# Altium PCB reflextest.PcbDoc
Units mil, origin at the board's own origin, x right, y up, seen from the top; angles counter-clockwise.
Board outline 6000 x 4000 mil, 2 copper layers (Top Layer, Bottom Layer); 2 components, 1 nets, 20 pads, 0 vias.
Unrouted connection lines stored in the file: 1.
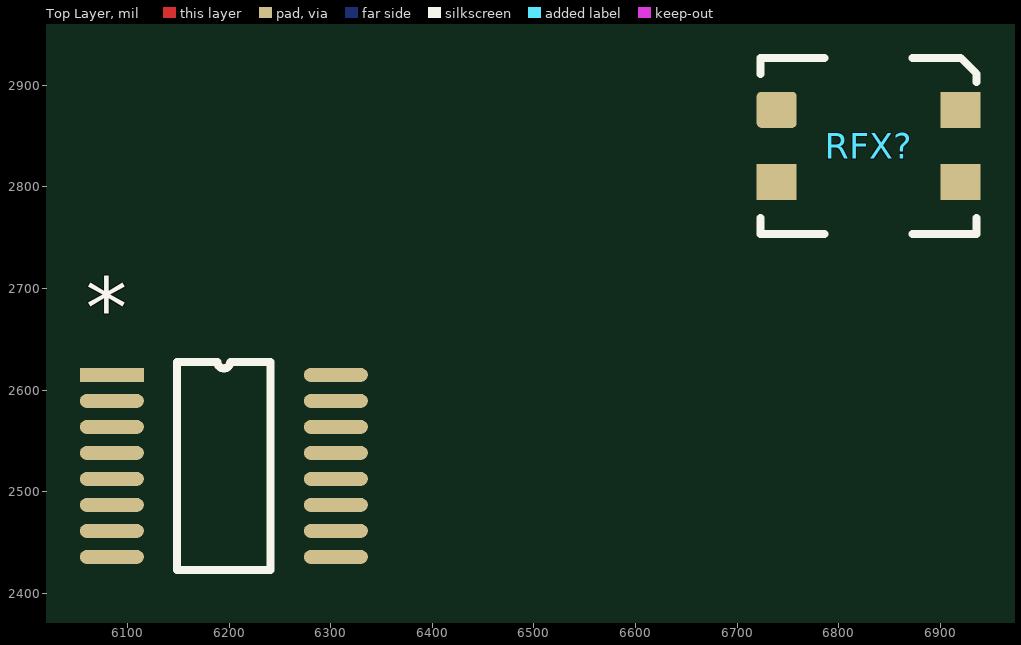
[diagram p0: Top Layer view]
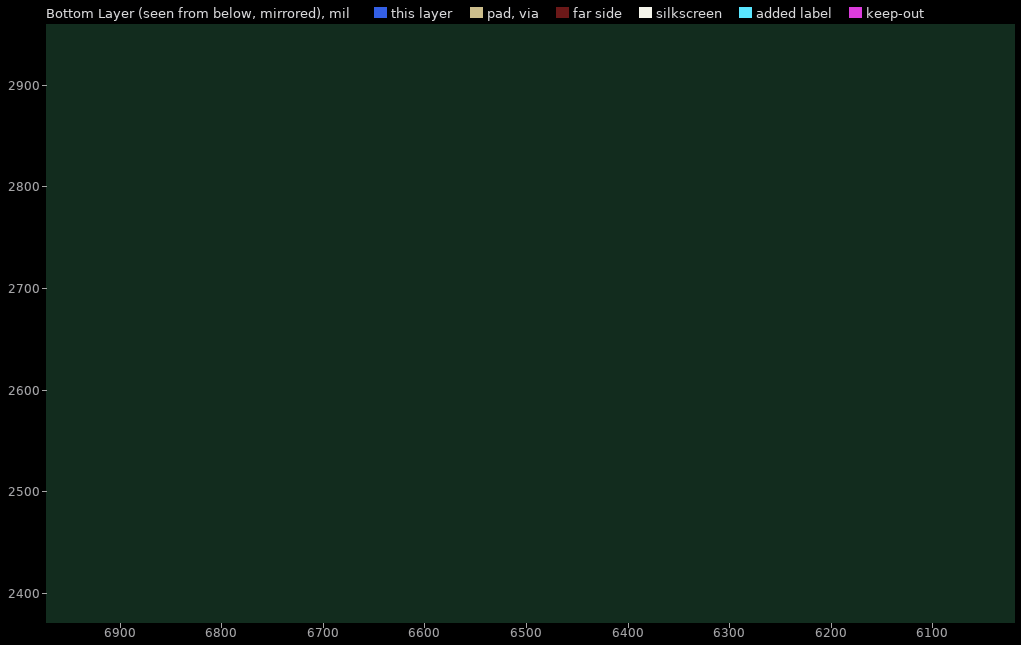
[diagram p1: Bottom Layer view, seen from below]

## Layer stack, top to bottom
Top Solder: solder mask 0.4, Solder Resist, Dk 3.5
Top Layer: signal copper 1.4
Dielectric 1: dielectric 12.6, FR-4, Dk 4.8
Bottom Layer: signal copper 1.4
Bottom Solder: solder mask 0.4, Solder Resist, Dk 3.5

## Board outline
1000,1000 7000,1000 7000,5000 1000,5000

## Design rules (kind name [scope] priority, off if disabled: settings)
Clearance [All] p1: gap=10
PolygonConnect [All] p1: connectstyle=Relief reliefconductorwidth=10 reliefentries=4 polygonreliefangle="90 Angle" airgapwidth=10
RoomDefinition Sheet1 [InComponentClass('Sheet1')] p1: confinementstyle=ConfineIn formatcopy=TRUE lockcomponents=FALSE outline 7045,1060 7645,1060 7645,1370 7045,1370
RoutingVias [All] p1: holewidth=28 width=50 viastyle="Through Hole" minholewidth=28 minwidth=50 maxholewidth=28 maxwidth=50
SolderMaskExpansion [All] p1: expansion=4
Width [All] p1: maxlimit=10 minlimit=10 preferedwidth=10
30 further rules are at their usual default settings.

## Components (designator, comment, footprint, x,y, rotation, side; value= is the part's Value field where it differs from the comment)
* "mux" 4051 6084.53,2615 r0 top
RFX? "ITR1201" "LCC4 - duplicate4" 6738.9,2875.87 r0 top

## Footprints (in the part's own frame and the unit in brackets; to place one, negate y for a bottom-side part, rotate by r counter-clockwise, add the part's x,y. Pads: shape width x height; smd on the part's side, far side on the other; paste and mask are expansions set on the pad)
4051 [mm]
  oval 1.6x0.35 smd: a(5.6,-3.25) b(5.6,-3.9) c(5.6,-4.55) COM(0,-1.3) gnd(0,-4.55) inh(0,-3.25) nc(0,-3.9) vcc(5.6,0) y0(5.6,-1.95) y1(5.6,-1.3) y2(5.6,-0.65) y3(5.6,-2.6) y5(0,-2.6) y6(0,-0.65) y7(0,-1.95)
  rect 1.6x0.35 smd: y4(0,0)
  silkscreen extent 1.63,-4.88 3.97,0.33
"LCC4 - duplicate4" [mm]
  rrect25% 1x0.9 smd: 1(0,0)
  rect 1x0.9 smd: 2(4.6,0) 3(0,-1.8) 4(4.6,-1.8)
  silkscreen extent -0.4,-3.1 5,1.3, body extent 0.6,-2.8 4,1, height 1.5

## Nets (pads, with @x,y where several pads share a name; then routed paths per layer and width w, separated by ;. In a path a pad name is that pad's centre, name@x,y a point inside that pad or via, vN(x,y) a via of type N, cw(c..) or ccw(c..) an arc to the next point about the centre after c; other vN are vias at no path point)
Net*_y4: *.y4 RFX?.3
pads on no net: *.a *.b *.c *.COM *.gnd *.inh *.nc *.vcc *.y0 *.y1 *.y2 *.y3 *.y5 *.y6 *.y7 RFX?.1 RFX?.2 RFX?.4